# Altium PCB Frequenzweiche.PcbDoc
Units mm, origin at the board's own origin, x right, y up, seen from the top; angles counter-clockwise.
Board outline 150 x 75 mm, 2 copper layers (Top Layer, Bottom Layer); 153 components, 113 nets, 582 pads, 77 vias.
Unrouted connection lines stored in the file: 84.
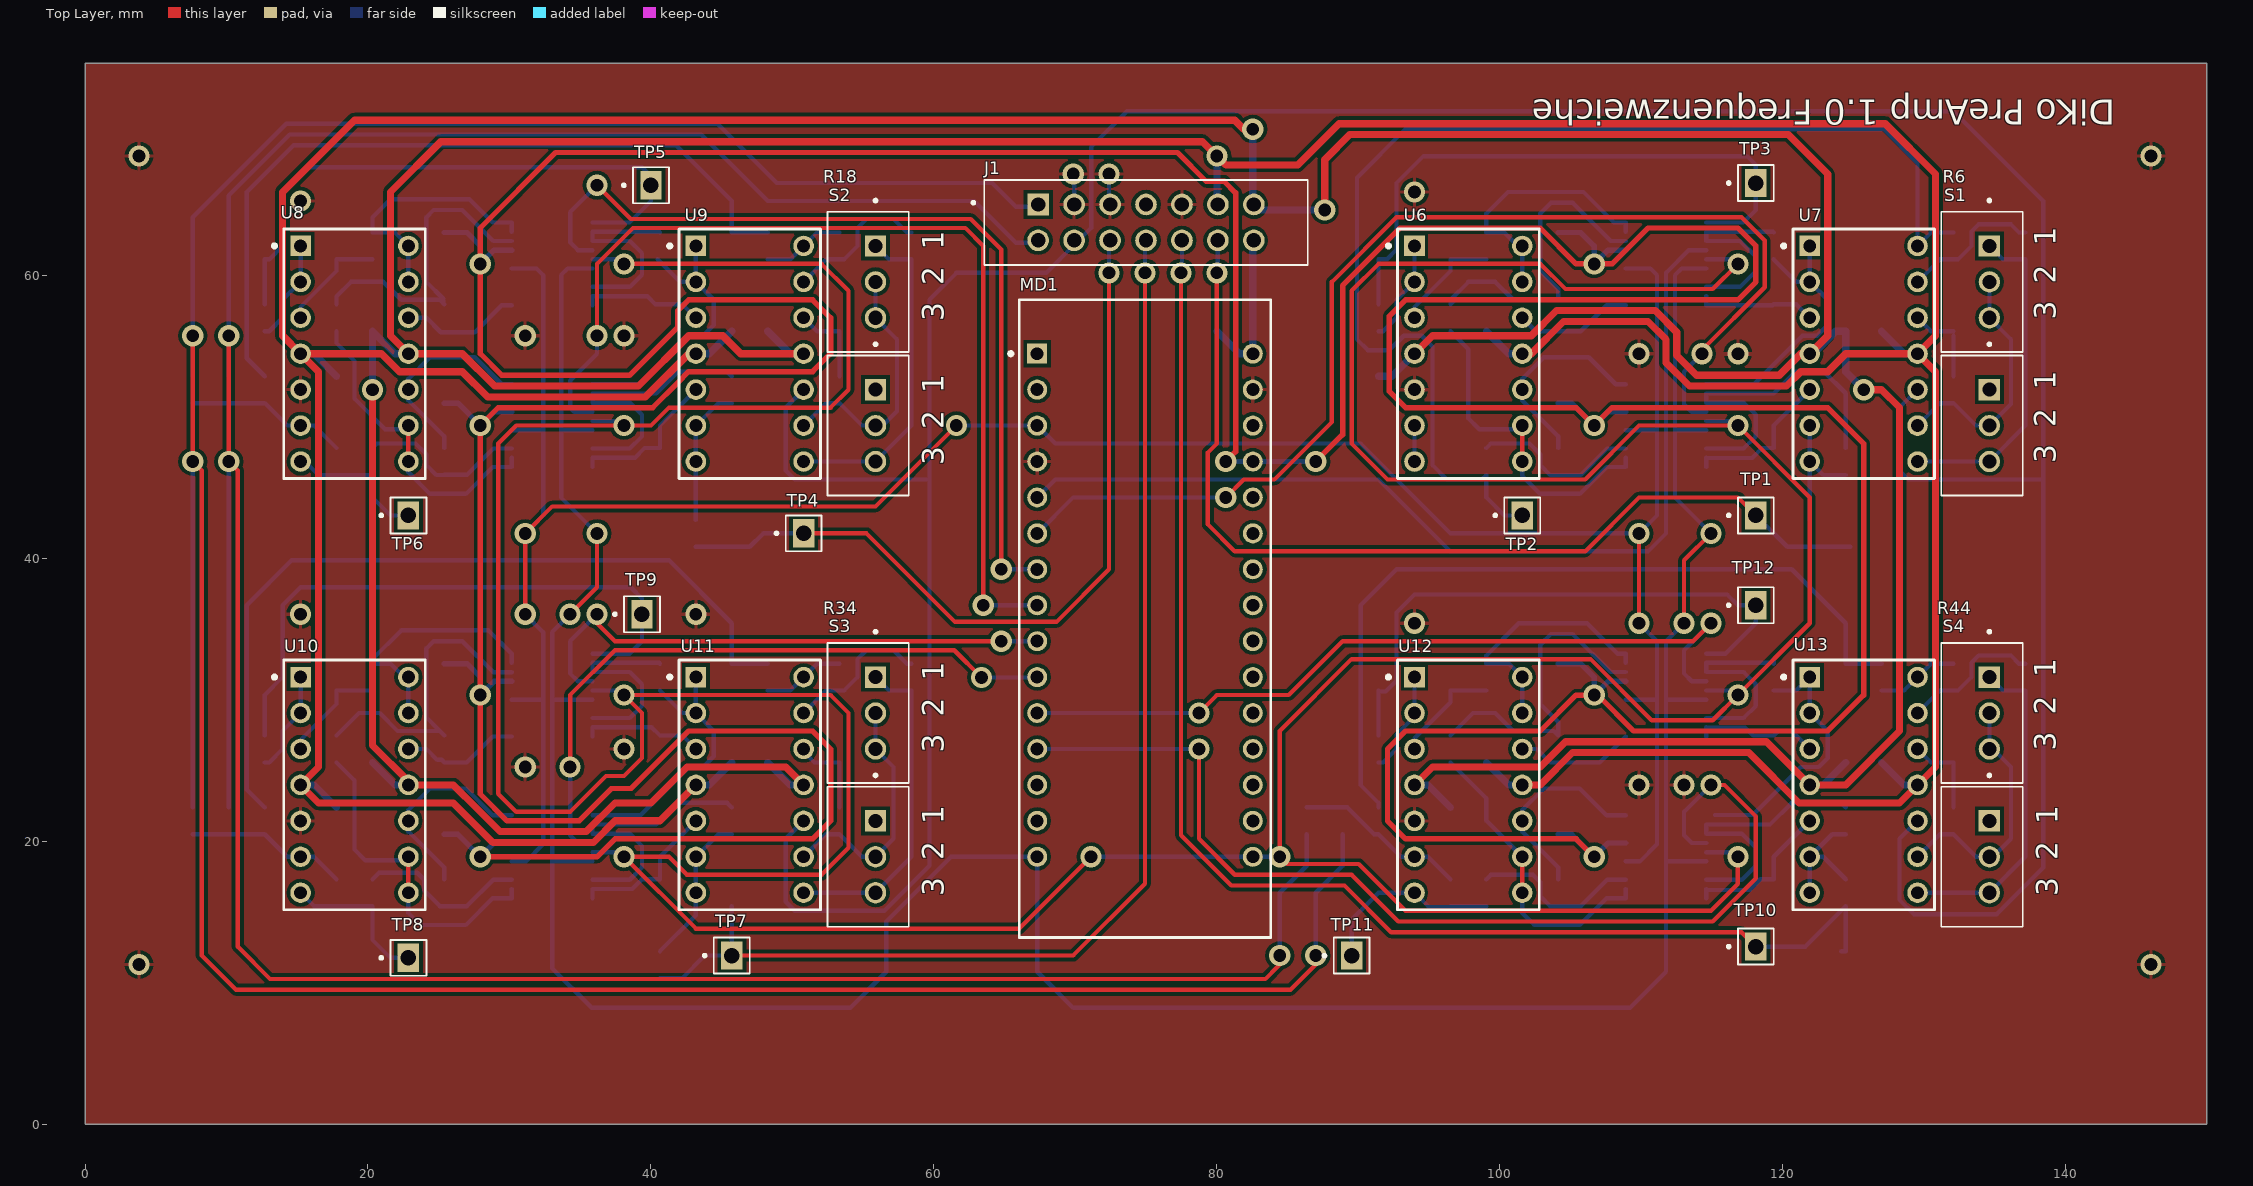
[diagram p0: Top Layer view]
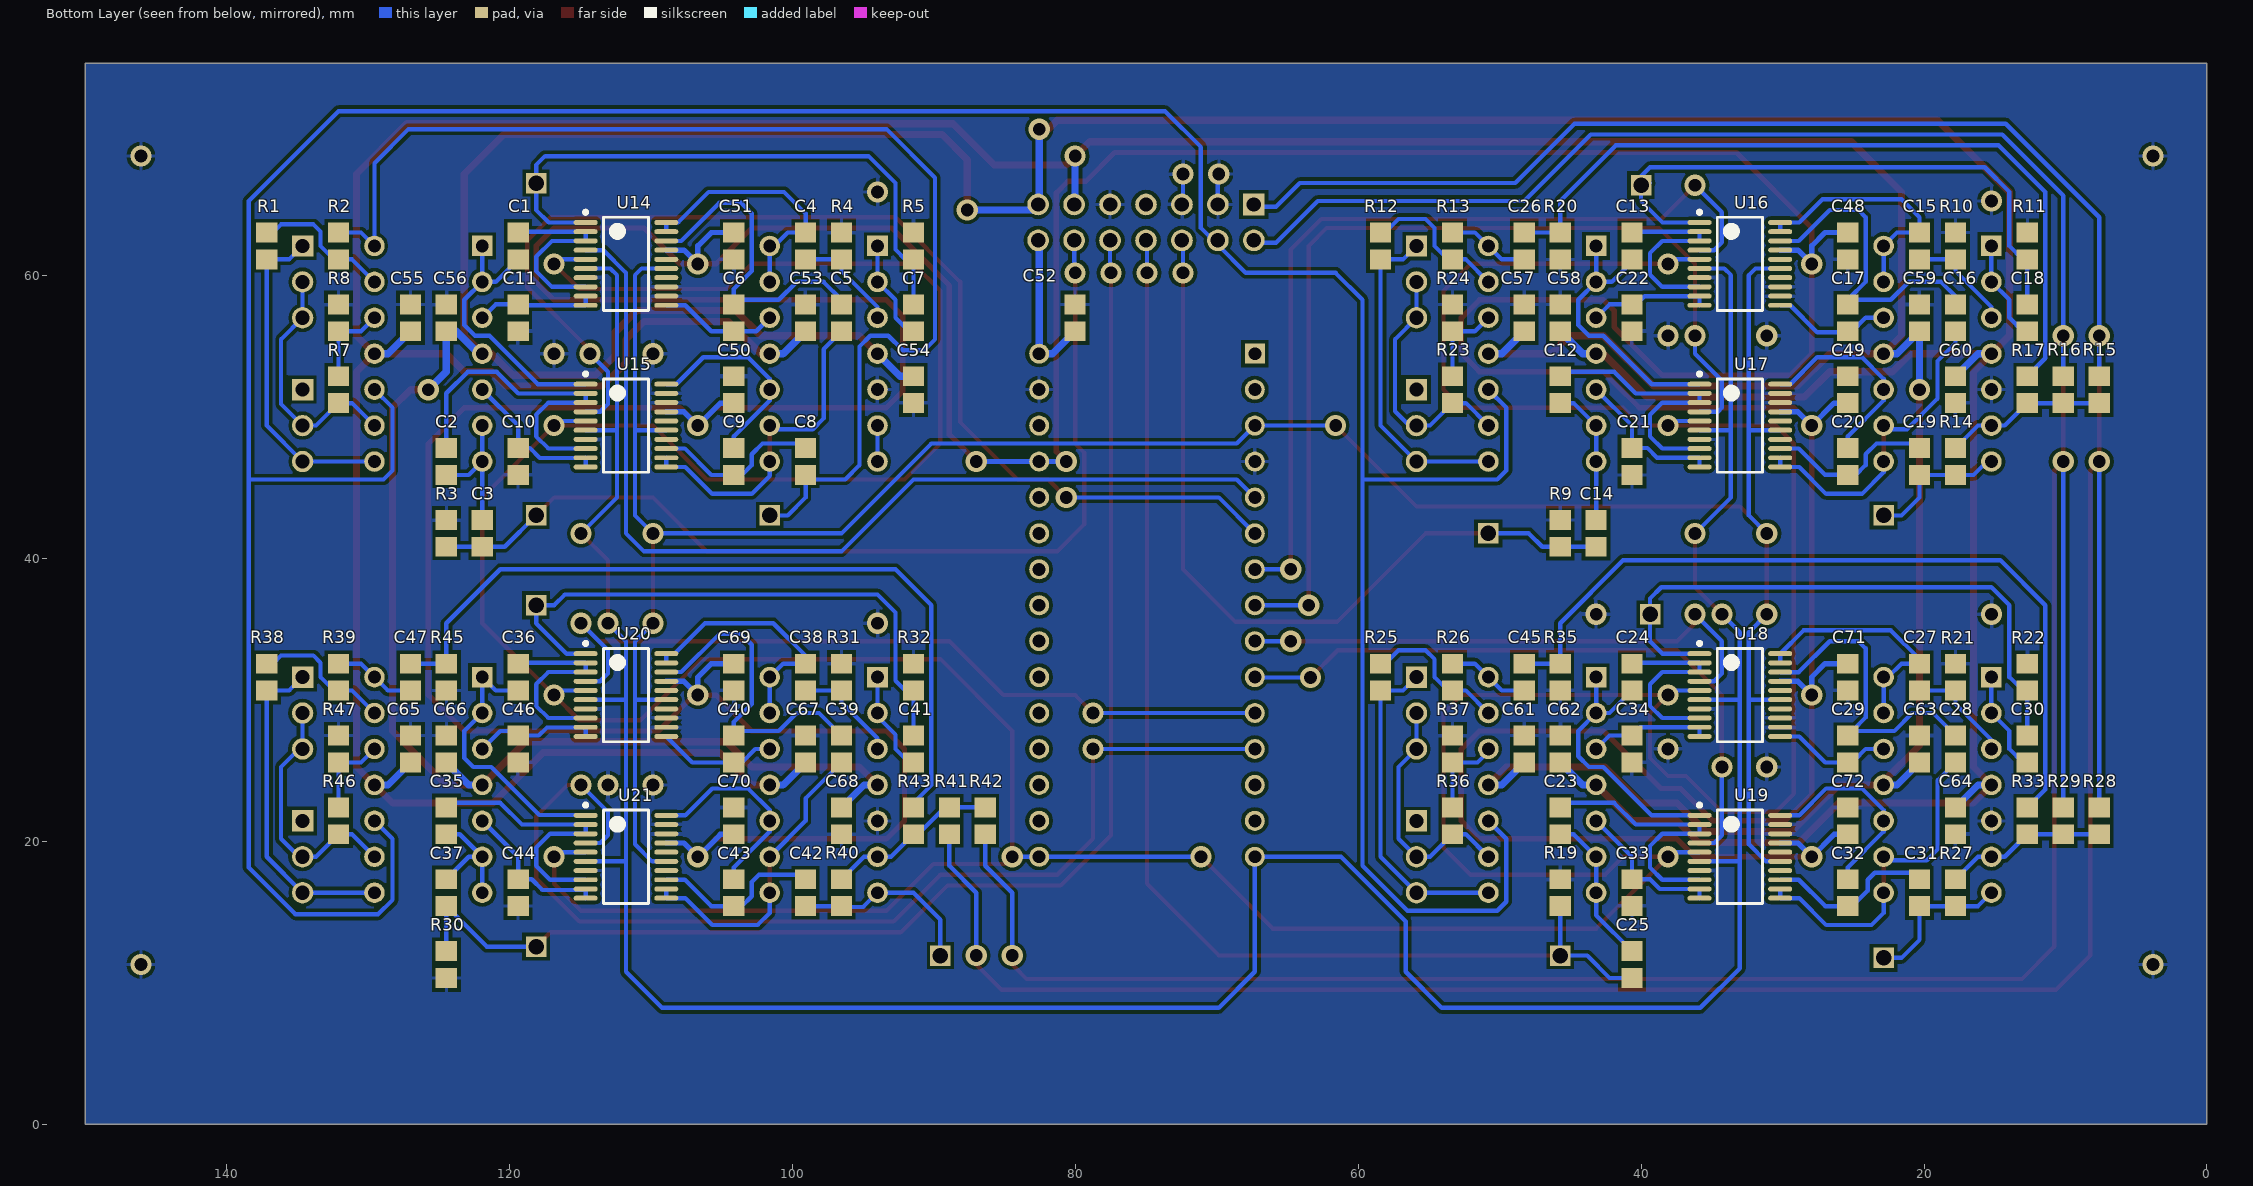
[diagram p1: Bottom Layer view, seen from below]
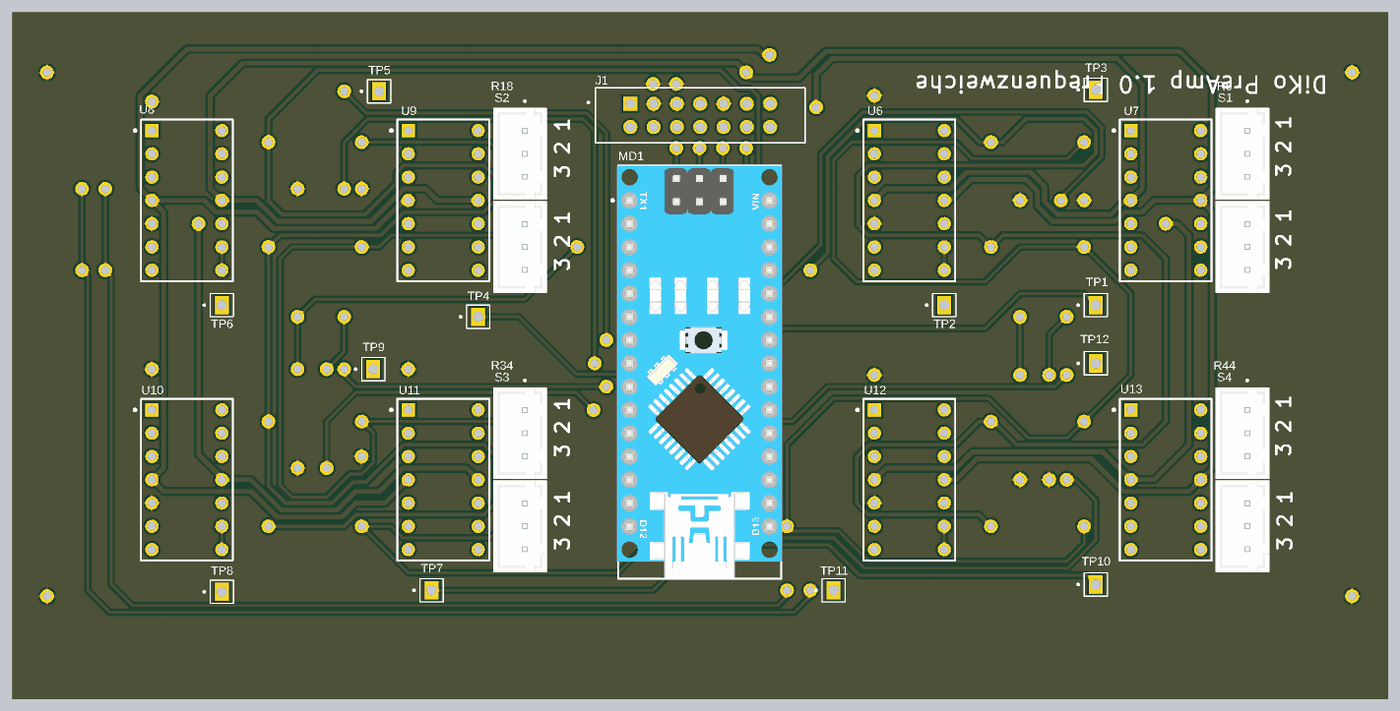
[diagram p2: 3D render of the assembled board from above, using the file's embedded part models]
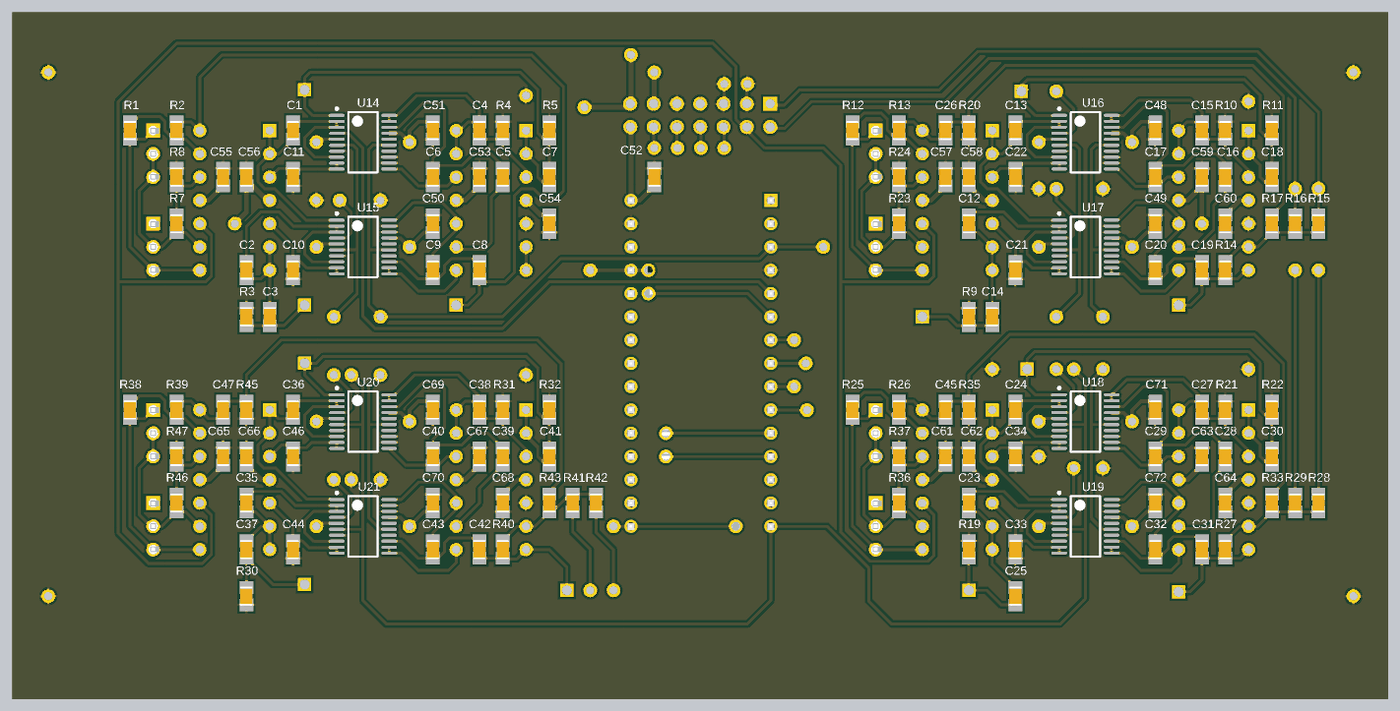
[diagram p3: 3D render of the assembled board from below, using the file's embedded part models]

## Layer stack, top to bottom
Top Solder: solder mask 0.0102, Solder Resist, Dk 3.5
Top Layer: signal copper 0.0356
Dielectric 1: dielectric 0.32, FR-4, Dk 4.8
Bottom Layer: signal copper 0.0356
Bottom Solder: solder mask 0.0102, Solder Resist, Dk 3.5

## Board outline
0,0 150,0 150,75 0,75

## Design rules (kind name [scope] priority, off if disabled: settings)
Clearance [All] p1: gap=0.254 ignorepadtopadclearanceinfootprint=FALSE except(0: Arc-Hole Track-Hole SMDPad-Hole THPad-Hole Via-Hole Fill-Hole Poly-Hole Region-Hole Text-Hole)
HoleSize [All] p1: absolutevalues=TRUE maxlimit=5.08 minlimit=0.152 maxpercent=80.000 minpercent=20.000
HoleToHoleClearance [All] p1: gap=0.203 allowstackedmicrovias=TRUE
MinimumSolderMaskSliver [All] p1: minsoldermaskwidth=0.102
PolygonConnect [All] p1: connectstyle=Relief reliefconductorwidth=0.254 reliefentries=4 polygonreliefangle="90 Angle" airgapwidth=0.254
RoutingVias [All] p1: holewidth=0.9 width=1.5 viastyle="Through Hole" minholewidth=0.711 minwidth=1.27 maxholewidth=0.914 maxwidth=1.524
SilkToSilkClearance [All] p1: silktosilkclearance=0.102
SilkToSolderMaskClearance [IsPad] p1: minsilkscreentomaskgap=0.152 clearancetoexposedcopper=TRUE
SolderMaskExpansion [All] p1: expansion=0.051 istentingtop=FALSE
Width +18V [InNet('+18V')] p1: maxlimit=0.508 minlimit=0.508 preferedwidth=0.508
Width -18V [InNet('-18V')] p2: maxlimit=0.508 minlimit=0.508 preferedwidth=0.508
Width +6V [InNet('+6V')] p3: maxlimit=0.508 minlimit=0.508 preferedwidth=0.508
Width +5V_DP [InNet('5V_DP')] p4: maxlimit=0.508 minlimit=0.381 preferedwidth=0.381
Width [All] p5: maxlimit=0.305 minlimit=0.254 preferedwidth=0.305
25 further rules are at their usual default settings.

## Components (designator, comment, footprint, x,y, rotation, side; value= is the part's Value field where it differs from the comment)
C1 "22n" 0805 119.38,62.07 r270 bottom
C2 "22n" 0805 124.46,46.83 r270 bottom
C3 "10u" 0805 121.92,41.75 r270 bottom
C4 "10u" 0805 99.06,62.07 r270 bottom
C5 "22n" 0805 96.52,56.99 r90 bottom
C6 "22n" 0805 104.14,56.99 r270 bottom
C7 "10u" 0805 91.44,56.99 r90 bottom
C8 "22n" 0805 99.06,46.83 r90 bottom
C9 "22n" 0805 104.14,46.83 r90 bottom
C10 "22n" 0805 119.38,46.83 r90 bottom
C11 "22n" 0805 119.38,56.99 r90 bottom
C12 "22n" 0805 45.72,51.91 r270 bottom
C13 "22n" 0805 40.64,62.07 r270 bottom
C14 "10u" 0805 43.18,41.75 r270 bottom
C15 "10u" 0805 20.32,62.07 r270 bottom
C16 "22n" 0805 17.78,56.99 r90 bottom
C17 "22n" 0805 25.4,56.99 r270 bottom
C18 "10u" 0805 12.7,56.99 r90 bottom
C19 "22n" 0805 20.32,46.83 r90 bottom
C20 "22n" 0805 25.4,46.83 r90 bottom
C21 "22n" 0805 40.64,46.83 r90 bottom
C22 "22n" 0805 40.64,56.99 r90 bottom
C23 "22n" 0805 45.72,21.43 r270 bottom
C24 "22n" 0805 40.64,31.59 r270 bottom
C25 "10u" 0805 40.64,11.27 r270 bottom
C26 "10u" 0805 48.26,62.07 r90 bottom
C27 "10u" 0805 20.32,31.59 r270 bottom
C28 "22n" 0805 17.78,26.51 r90 bottom
C29 "22n" 0805 25.4,26.51 r270 bottom
C30 "10u" 0805 12.7,26.51 r90 bottom
C31 "22n" 0805 20.32,16.35 r90 bottom
C32 "22n" 0805 25.4,16.35 r90 bottom
C33 "22n" 0805 40.64,16.35 r90 bottom
C34 "22n" 0805 40.64,26.51 r90 bottom
C35 "22n" 0805 124.46,21.43 r270 bottom
C36 "22n" 0805 119.38,31.59 r270 bottom
C37 "10u" 0805 124.46,16.35 r270 bottom
C38 "10u" 0805 99.06,31.59 r270 bottom
C39 "22n" 0805 96.52,26.51 r90 bottom
C40 "22n" 0805 104.14,26.51 r270 bottom
C41 "10u" 0805 91.44,26.51 r90 bottom
C42 "22n" 0805 99.06,16.35 r90 bottom
C43 "22n" 0805 104.14,16.35 r90 bottom
C44 "22n" 0805 119.38,16.35 r90 bottom
C45 "10u" 0805 48.26,31.59 r90 bottom
C46 "22n" 0805 119.38,26.51 r90 bottom
C47 "10u" 0805 127,31.59 r90 bottom
C48 "100n" 0805 25.4,62.07 r90 bottom
C49 "100n" 0805 25.4,51.91 r270 bottom
C50 "100n" 0805 104.14,51.91 r270 bottom
C51 "100n" 0805 104.14,62.07 r90 bottom
C52 "100n" 0805 80.01,56.99 r270 bottom
C53 "100n" 0805 99.06,56.99 r270 bottom
C54 "100n" 0805 91.44,51.91 r90 bottom
C55 "100n" 0805 127,56.99 r270 bottom
C56 "100n" 0805 124.46,56.99 r270 bottom
C57 "100n" 0805 48.26,56.99 r270 bottom
C58 "100n" 0805 45.72,56.99 r270 bottom
C59 "100n" 0805 20.32,56.99 r270 bottom
C60 "100n" 0805 17.78,51.91 r90 bottom
C61 "100n" 0805 48.26,26.51 r270 bottom
C62 "100n" 0805 45.72,26.51 r270 bottom
C63 "100n" 0805 20.32,26.51 r270 bottom
C64 "100n" 0805 17.78,21.43 r90 bottom
C65 "100n" 0805 127,26.51 r270 bottom
C66 "100n" 0805 124.46,26.51 r270 bottom
C67 "100n" 0805 99.06,26.51 r270 bottom
C68 "100n" 0805 96.52,21.43 r90 bottom
C69 "100n" 0805 104.14,31.59 r90 bottom
C70 "100n" 0805 104.14,21.43 r270 bottom
C71 "100n" 0805 25.4,31.59 r90 bottom
C72 "100n" 0805 25.4,21.43 r270 bottom
J1 "Connector x14" "Connector x14" 75,62.46 r180 top
MD1 "A000005" "Arduino Nano" 74.93,35.718 r0 top
R1 "4k7" 0805 137.16,62.07 r90 bottom
R2 "10k" 0805 132.08,62.07 r90 bottom
R3 "220k" 0805 124.46,41.75 r270 bottom
R4 "220k" 0805 96.52,62.07 r270 bottom
R5 "220k" 0805 91.44,62.07 r270 bottom
R6 "47k log" "Connector x3" 134.62,59.53 r90 top
R7 "2k2" 0805 132.08,51.91 r90 bottom
R8 "5k" 0805 132.08,56.99 r270 bottom
R9 "220k" 0805 45.72,41.75 r270 bottom
R10 "220k" 0805 17.78,62.07 r270 bottom
R11 "220k" 0805 12.7,62.07 r270 bottom
R12 "4k7" 0805 58.42,62.07 r90 bottom
R13 "10k" 0805 53.34,62.07 r90 bottom
R14 "10k" 0805 17.78,46.83 r270 bottom
R15 "10k" 0805 7.62,51.91 r270 bottom
R16 "10k" 0805 10.16,51.91 r270 bottom
R17 "10k" 0805 12.7,51.91 r270 bottom
R18 "47k log" "Connector x3" 55.88,59.53 r90 top
R19 "220k" 0805 45.72,16.35 r270 bottom
R20 "220k" 0805 45.72,62.07 r90 bottom
R21 "220k" 0805 17.78,31.59 r270 bottom
R22 "220k" 0805 12.7,31.59 r270 bottom
R23 "2k2" 0805 53.34,51.91 r90 bottom
R24 "5k" 0805 53.34,56.99 r270 bottom
R25 "4k7" 0805 58.42,31.59 r90 bottom
R26 "10k" 0805 53.34,31.59 r90 bottom
R27 "10k" 0805 17.78,16.35 r270 bottom
R28 "10k" 0805 7.62,21.43 r270 bottom
R29 "10k" 0805 10.16,21.43 r270 bottom
R30 "220k" 0805 124.46,11.27 r90 bottom
R31 "220k" 0805 96.52,31.59 r270 bottom
R32 "220k" 0805 91.44,31.59 r270 bottom
R33 "10k" 0805 12.7,21.43 r270 bottom
R34 "47k log" "Connector x3" 55.88,29.05 r90 top
R35 "220k" 0805 45.72,31.59 r90 bottom
R36 "2k2" 0805 53.34,21.43 r90 bottom
R37 "5k" 0805 53.34,26.51 r270 bottom
R38 "4k7" 0805 137.16,31.59 r90 bottom
R39 "10k" 0805 132.08,31.59 r90 bottom
R40 "10k" 0805 96.52,16.35 r270 bottom
R41 "10k" 0805 88.9,21.43 r90 bottom
R42 "10k" 0805 86.36,21.43 r90 bottom
R43 "10k" 0805 91.44,21.43 r270 bottom
R44 "47k log" "Connector x3" 134.62,29.05 r90 top
R45 "220k" 0805 124.46,31.59 r90 bottom
R46 "2k2" 0805 132.08,21.43 r90 bottom
R47 "5k" 0805 132.08,26.51 r270 bottom
S1 "Schalter Buchsenleiste" "Connector x3" 134.62,49.37 r90 top
S2 "Schalter Buchsenleiste" "Connector x3" 55.88,49.37 r90 top
S3 "Schalter Buchsenleiste" "Connector x3" 55.88,18.89 r90 top
S4 "Schalter Buchsenleiste" "Connector x3" 134.62,18.89 r90 top
TP1 "Test_Pin" Test_Pin 119.38,43.02 r0 top
TP2 "Test_Pin" Test_Pin 102.87,43.02 r0 top
TP3 "Test_Pin" Test_Pin 119.38,66.515 r0 top
TP4 "Test_Pin" Test_Pin 52.07,41.75 r0 top
TP5 "Test_Pin" Test_Pin 41.275,66.355 r0 top
TP6 "Test_Pin" Test_Pin 24.13,43.02 r0 top
TP7 "Test_Pin" Test_Pin 46.99,11.905 r0 top
TP8 "Test_Pin" Test_Pin 24.13,11.745 r0 top
TP9 "Test_Pin" Test_Pin 40.64,36.035 r0 top
TP10 "Test_Pin" Test_Pin 119.38,12.54 r0 top
TP11 "Test_Pin" Test_Pin 90.805,11.905 r0 top
TP12 "Test_Pin" Test_Pin 119.38,36.67 r0 top
U6 "OPA4134UA" "DIP14 IC Socket" 97.79,54.45 r90 top
U7 "OPA4134UA" "DIP14 IC Socket" 125.73,54.45 r90 top
U8 "OPA4134UA" "DIP14 IC Socket" 19.05,54.45 r90 top
U9 "OPA4134UA" "DIP14 IC Socket" 46.99,54.45 r90 top
U10 "OPA4134UA" "DIP14 IC Socket" 19.05,23.97 r90 top
U11 "OPA4134UA" "DIP14 IC Socket" 46.99,23.97 r90 top
U12 "OPA4134UA" "DIP14 IC Socket" 97.79,23.97 r90 top
U13 "OPA4134UA" "DIP14 IC Socket" 125.73,23.97 r90 top
U14 "MCP4361-103E/ST" "MCP 4361" 111.76,60.8 r180 bottom
U15 "MCP4361-103E/ST" "MCP 4361" 111.76,49.37 r180 bottom
U16 "MCP4361-103E/ST" "MCP 4361" 33.02,60.8 r180 bottom
U17 "MCP4361-103E/ST" "MCP 4361" 33.02,49.37 r180 bottom
U18 "MCP4361-103E/ST" "MCP 4361" 33.02,30.32 r180 bottom
U19 "MCP4361-103E/ST" "MCP 4361" 33.02,18.89 r180 bottom
U20 "MCP4361-103E/ST" "MCP 4361" 111.76,30.32 r180 bottom
U21 "MCP4361-103E/ST" "MCP 4361" 111.76,18.89 r180 bottom

## Footprints (in the part's own frame and the unit in brackets; to place one, negate y for a bottom-side part, rotate by r counter-clockwise, add the part's x,y. Pads: shape width x height; smd on the part's side, far side on the other; paste and mask are expansions set on the pad)
0805 [mm] "0805"
  rect 1.4x1.5 smd: 1(-0.95,0) 2(0.95,0)
  body extent -1.05,-0.67 1.05,0.67, height 1.35
"Arduino Nano" [mil]
  rect 55.67x55.67 hole 35.98 paste-39370.1 mask+0: 1(-300,737.5)
  round 55.67 hole 35.98 paste-39370.1 mask+0: 2(-300,637.5) 3(-300,537.5) 4(-300,437.5) 5(-300,337.5) 6(-300,237.5) 7(-300,137.5) 8(-300,37.5) 9(-300,-62.5) 10(-300,-162.5) 11(-300,-262.5) 12(-300,-362.5) 13(-300,-462.5) 14(-300,-562.5) 15(-300,-662.5) 16(300,-662.5) 17(300,-562.5) 18(300,-462.5) 19(300,-362.5) 20(300,-262.5) 21(300,-162.5) 22(300,-62.5) 23(300,37.5) 24(300,137.5) 25(300,237.5) 26(300,337.5) 27(300,437.5) 28(300,537.5) 29(300,637.5) 30(300,737.5)
  silkscreen extent -379,-888 350,888, body extent -354,-891 354,891, height 10
"Connector x3" [mm] "Connector x3"
  rect 1.508x1.508 / inner round 1.508 / far side rect 1.508x1.508 hole 1: 1(2.54,0)
  round 1.508 hole 1: 2(0,0) 3(-2.54,0)
  silkscreen extent -4.95,-2.35 5.85,3.4, body extent -4.95,-2.35 4.95,3.4, height 7
"Connector x14" [mm]
  rect 1.53x1.53 hole 1.02: 1(7.62,-2.54)
  round 1.53 hole 1.02: 2(7.62,0) 3(5.08,-2.54) 4(5.08,0) 5(2.54,-2.54) 6(2.54,0) 7(0,-2.54) 8(0,0) 9(-2.54,-2.54) 10(-2.54,0) 11(-5.08,-2.54) 12(-5.08,0) 13(-7.62,-2.54) 14(-7.62,0)
  silkscreen extent -11.43,-4.27 12.3,1.73
"DIP14 IC Socket" [mm] "Socket, 14-Leads, Body 17.653x10.0076mm, Pitch 2.54mm"
  rect 1.45x1.45 hole 0.911: 1(7.62,3.81)
  round 1.45 hole 0.911: 2(5.08,3.81) 3(2.54,3.81) 4(0,3.81) 5(-2.54,3.81) 6(-5.08,3.81) 7(-7.62,3.81) 8(-7.62,-3.81) 9(-5.08,-3.81) 10(-2.54,-3.81) 11(0,-3.81) 12(2.54,-3.81) 13(5.08,-3.81) 14(7.62,-3.81)
  silkscreen extent -8.83,-5 8.83,5.78, body extent -8.83,-5 8.83,5, height 5.36
"MCP 4361" [mm] "TSOP, 20-Leads, Body 6.5x4.4mm, Pitch 0.65mm, IPC Medium Density"
  oval 1.7x0.35 smd: 1(-2.85,2.925) 2(-2.85,2.275) 3(-2.85,1.625) 4(-2.85,0.975) 5(-2.85,0.325) 6(-2.85,-0.325) 7(-2.85,-0.975) 8(-2.85,-1.625) 9(-2.85,-2.275) 10(-2.85,-2.925) 11(2.85,-2.925) 12(2.85,-2.275) 13(2.85,-1.625) 14(2.85,-0.975) 15(2.85,-0.325) 16(2.85,0.325) 17(2.85,0.975) 18(2.85,1.625) 19(2.85,2.275) 20(2.85,2.925)
  silkscreen extent -2.98,-3.3 1.6,3.77, body extent -2.25,-3.3 2.25,3.3, height 1.2
Test_Pin [mm]
  rect 1.508x2 / inner round 1.45 / far side rect 1.45x1.45 hole 1.1: 01(-1.27,0)
  silkscreen extent -3.29,-1.27 0,1.27

## Part data
C1 C2 C3 C4 C5 C6 C7 C8 C9 C10 C11 C12 C13 C14 C15 C16 C17 C18 C19 C20 C21 C22 C23 C24 C25 C26 C27 C28 C29 C30 C31 C32 C33 C34 C35 C36 C37 C38 C39 C40 C41 C42 C43 C44 C45 C46 C47 C48 C49 C50 C51 C52 C53 C54 C55 C56 C57 C58 C59 C60 C61 C62 C63 C64 C65 C66 C67 C68 C69 C70 C71 C72: library part "0805 Kondensator", "0805 Kondensator"
J1: "14 Position Header Connector Through Hole", Package=None, Availability=Warning, Check_prices=https://www.snapeda.com/parts/SFH11-PBPC-D07-ST-BK/Sullins%20Connector%20Solutions/view-part/851415/?ref=eda, MF="Sullins Connector", MP=SFH11-PBPC-D07-ST-BK, Price=None, Purchase-URL=https://pricing.snapeda.com/search/part/SFH11-PBPC-D07-ST-BK/?ref=eda, SnapEDA_Link=https://www.snapeda.com/parts/SFH11-PBPC-D07-ST-BK/Sullins%20Connector%20Solutions/view-part/851415/?ref=snap, System=Connector
MD1: library part "Arduino Nano", "ARDUINO NANO ATMEGA328 EVAL BRD", Operating Supply Voltage=12V, Package Quantity=50, Core Architecture=AVR, Data Bus Width=8b, Evaluation Kit=Yes, Height=0.25inch, Interface=I2C, Length=7inch, Number of Bits=8, Packaging=Bulk, REACH SVHC="No SVHC", Series="AVR® ATmega", Weight=0.358383oz, Width=5inch
R1 R2 R3 R4 R5 R7 R8 R9 R10 R11 R12 R13 R14 R15 R16 R17 R19 R20 R21 R22 R23 R24 R25 R26 R27 R28 R29 R30 R31 R32 R33 R35 R36 R37 R38 R39 R40 R41 R42 R43 R45 R46 R47: library part "0805 Widerstand", "0805 Widerstand"
R6 R18 R34 R44: library part "Potentiometer Buchsenleiste", "Potentiometer"
S1 S2 S3 S4: "Toggle Switch SPDT Through Hole", Package=None, Availability=Unavailable, MP=100SP1T1B4M2QE, Price=None
TP1 TP2 TP3 TP4 TP5 TP6 TP7 TP8 TP9 TP10 TP11 TP12: "Connector Header Through Hole 2 position 0.100 (2.54mm)", Package=None, Check_prices=https://www.snapeda.com/parts/61300211121/Wurth+Elektronik/view-part/?ref=eda, MF="Wurth Elektronik", MP=61300211121, SnapEDA_Link=https://www.snapeda.com/parts/61300211121/Wurth+Elektronik/view-part/?ref=snap
U6 U7 U8 U9 U10 U11 U12 U13: library part "SOIC OPA4134UA", "SoundPlus(TM) High Performance Audio Operational Amplifier, 5 to 36 V, -55 to 125 degC, 14-pin SOIC (D14), Green (RoHS & no Sb/Br)", Manufacturer="Texas Instruments", Code_JEDEC=MS-012, ComponentLink1Description="Manufacturer URL", ComponentLink1URL=http://www.ti.com/, ComponentLink2Description=Datasheet, ComponentLink2URL=http://www.ti.com/general/docs/lit/getliterature.tsp?genericPartNumber=OPA4134&fileType=pdf, ComponentLink3Description="Package Specification", ComponentLink3URL=http://www.ti.com/lit/ml/mpds177g/mpds177g.pdf, DatasheetVersion=SBOS058, Eco-Plan="Green (RoHS & no Sb/Br)", GBW(Typ)(MHz)=8, Iq per channel(Max)(mA)=5, Mounting Technology="Surface Mount", Number of Channels=4, PackageDescription="14-Pin Plastic Small Outline, Body 8.65 x 3.9 mm, Pitch 1.27 mm", PackageReference=D0014A, PackageVersion="4040047-5/M, 06/2011", PartNumber=OPA4134UA, SubFamily="Audio Operational Amplifier", Vmax(V)=36, Vmin(V)=5, Vn at Flatband(Typ)(nV/rtHz)=8
U14 U15 U16 U17 U18 U19 U20 U21: library part "MCP 4361", "7/8-Bit Quad SPI Digital POT with Non-Volatile Memory, 20-Pin TSSOP, Extended Temperature", Code_JEDEC=MO-153-AC, ComponentLink1Description="Manufacturer URL", ComponentLink1URL=http://www.microchip.com/, ComponentLink2Description=Datasheet, ComponentLink2URL=http://ww1.microchip.com/downloads/en/DeviceDoc/22233a.pdf, ComponentLink3Description="Package Specification", ComponentLink3URL=http://www.microchip.com/stellent/groups/techpub_sg/documents/packagingspec/en012702.pdf, DatasheetVersion="revA, Dec-2009", PackageDescription="20-Lead Plastic Thin Shrink Small Outline (ST) - 4.4mm Body [TSSOP]", PackageReference=TSSOP-ST20, PackageVersion="revBB, Aug-2009"

## Via types
v1: diameter 1.5, hole 0.9, Top Layer to Bottom Layer, 77 vias

## Nets (pads, with @x,y where several pads share a name; then routed paths per layer and width w, separated by ;. In a path a pad name is that pad's centre, name@x,y a point inside that pad or via, vN(x,y) a via of type N, cw(c..) or ccw(c..) an arc to the next point about the centre after c; other vN are vias at no path point)
5V_DP: C48.2 C49.2 C50.2 C51.2 C69.2 C70.2 C71.2 C72.2 MD1.27 U14.17 U15.17 U16.17 U17.17 U18.17 U19.17 U20.17 U21.17 | length 479.3
  Top Layer w0.381: v1(27.94,18.89) 36.195,18.89 37.465,20.16 51.435,20.16 52.705,21.43 52.705,26.51 51.435,27.78 42.672,27.78 38.608,23.716 37.211,23.716 34.925,21.43 29.845,21.43 27.94,23.335 v1(27.94,30.32) v1(27.94,49.37) 29.21,50.64 40.132,50.64 41.91,52.418 42.672,53.18 51.435,53.18 52.705,54.45 52.705,56.99 51.435,58.26 42.672,58.26 41.91,57.498 41.91,56.355 38.481,52.926 29.464,52.926 27.94,54.45 v1(27.94,60.8) 27.94,63.34 33.274,68.674 77.216,68.674 79.248,66.642 80.518,66.642 81.339,65.821 81.339,47.524 v1(80.645,46.83) ; v1(86.995,46.83) 88.9,48.735 88.9,59.276 92.964,63.34 102.87,63.34 105.41,60.8 v1(106.68,60.8) 107.95,60.8 110.49,63.34 116.84,63.34 118.11,62.07 118.11,59.53 116.84,58.26 93.345,58.26 92.202,57.117 92.202,51.783 93.345,50.64 105.41,50.64 v1(106.68,49.37) 107.95,50.64 123.19,50.64 125.73,48.1 125.73,30.32 123.19,27.78 109.474,27.78 106.934,30.32 v1(106.68,30.32) 105.41,30.32 102.87,27.78 93.345,27.78 92.075,26.51 92.075,21.43 93.345,20.16 105.41,20.16 v1(106.68,18.89)
  Bottom Layer w0.381: C72.2 26.35,20.48 v1(27.94,18.89) 28.915,19.865 U19.17 ; C71.2 26.99,32.54 27.94,31.59 v1(27.94,30.32) 28.915,31.295 U18.17 ; C49.2 26.35,50.96 v1(27.94,49.37) 28.915,50.345 U17.17 ; C48.2 26.99,63.02 27.94,62.07 v1(27.94,60.8) 28.915,61.775 U16.17 ; v1(80.645,46.83) MD1.27 v1(86.995,46.83) ; C70.2 105.09,20.48 v1(106.68,18.89) 107.655,19.865 U21.17 ; C69.2 105.73,32.54 106.68,31.59 v1(106.68,30.32) 107.655,31.295 U20.17 ; C50.2 105.09,50.96 v1(106.68,49.37) 107.655,50.345 U15.17 ; C51.2 105.73,63.02 106.68,62.07 v1(106.68,60.8) 107.655,61.775 U14.17
+6V: C52.2 J1.14 MD1.30 | length 11.1
  Bottom Layer w0.508: C52.2 81.6,54.45 MD1.30 82.55,62.23 J1.14@82.62,62.3
+18V: C54.2 C56.2 C58.2 C60.2 C62.2 C64.2 C66.2 C68.2 J1.13 U6.4 U7.4 U8.4 U9.4 U10.4 U11.4 U12.4 U13.4 | length 368.3
  Top Layer w0.508: U11.4 40.64,21.43 37.465,21.43 35.941,19.906 28.829,19.906 26.035,22.7 16.51,22.7 U10.4 16.51,25.24 16.51,53.18 15.875,53.815 U8.4 ; U9.4 42.672,54.45 39.624,51.402 28.448,51.402 26.67,53.18 22.225,53.18 20.955,54.45 U8.4 ; v1(82.55,70.325) 81.915,70.325 81.28,70.96 19.05,70.96 13.97,65.88 13.97,55.72 U8.4 ; v1(87.63,64.61) 87.63,68.166 89.408,69.944 120.396,69.944 123.19,67.15 123.19,55.72 U7.4 121.285,54.45 119.761,52.926 113.919,52.926 112.522,54.323 112.522,55.974 110.998,57.498 104.013,57.498 102.235,55.72 95.25,55.72 U6.4 ; U12.4 95.25,25.24 102.87,25.24 104.648,27.018 118.872,27.018 U13.4 124.46,23.97 128.27,27.78 128.27,50.64 127,51.91 v1(125.73,51.91)
  Bottom Layer w0.508: U10.4 16.19,23.97 C64.2 ; U8.4 16.19,54.45 C60.2 ; U11.4 44.13,23.97 C62.2 ; U9.4 44.13,54.45 C58.2 ; J1.13@82.55,64.91 v1(82.55,70.325) ; J1.13 83.01,64.61 v1(87.63,64.61) ; C54.2 92.39,52.86 U6.4 ; U12.4 94.93,23.97 C68.2 ; U13.4 122.87,23.97 C66.2 ; U7.4 122.174,54.45 123.764,56.04 C56.2 124.46,53.18 v1(125.73,51.91)
-18V: C53.2 C55.2 C57.2 C59.2 C61.2 C63.2 C65.2 C67.2 J1.11 U6.11 U7.11 U8.11 U9.11 U10.11 U11.11 U12.11 U13.11 | length 359.3
  Top Layer w0.508: v1(20.32,51.91) 20.32,26.764 22.86,24.224 U10.11 26.035,23.97 27.813,22.192 29.337,20.668 35.433,20.668 37.465,22.7 40.005,22.7 42.545,25.24 49.53,25.24 U11.11 ; U9.11 46.355,54.45 45.085,55.72 42.672,55.72 39.116,52.164 28.956,52.164 26.67,54.45 U8.11 21.59,55.72 21.59,65.88 25.146,69.436 78.994,69.436 v1(80.01,68.42) 80.645,67.785 85.725,67.785 88.646,70.706 127.254,70.706 130.81,67.15 130.81,55.72 U7.11 ; U12.11 102.87,23.97 105.156,26.256 117.602,26.256 121.158,22.7 128.27,22.7 U13.11 130.81,25.24 130.81,53.18 U7.11 ; U6.11 102.235,54.45 104.521,56.736 110.49,56.736 111.76,55.466 111.76,53.815 113.411,52.164 120.269,52.164 121.285,53.18 123.19,53.18 124.46,54.45 U7.11
  Bottom Layer w0.508: C63.2 21.91,23.97 U10.11 ; v1(20.32,51.91) C59.2 21.91,54.45 U8.11 ; C61.2 49.85,23.97 U11.11 ; C57.2 49.85,54.45 U9.11 ; v1(80.01,68.42) 80.01,64.91 J1.11@80.08,64.84 ; C67.2 100.65,23.97 U12.11 ; C53.2 100.65,54.45 U6.11 ; C65.2 128.59,23.97 U13.11 ; C55.2 128.59,54.45 U7.11
ASEQ_Bass: C3.2 J1.12 R3.2 TP1.01 | length 69.4
  Top Layer w0.305: v1(80.01,60.165) 80.01,48.1 79.375,47.465 79.375,42.385 81.28,40.48 106.045,40.48 109.855,44.29 116.84,44.29 TP1.01
  Bottom Layer w0.305: v1(80.01,60.165) 80.08,60.235 J1.12@80.08,62.3 ; TP1.01 120.33,40.8 C3.2 R3.2 R3.2@124.78,40.8
ASEQ_Höhen: C37.2 J1.10 R30.2 TP10.01 | length 97.3
  Top Layer w0.305: v1(77.47,60.165) 77.47,21.43 77.47,20.414 81.026,16.858 89.027,16.858 92.329,13.556 117.094,13.556 TP10.01
  Bottom Layer w0.305: v1(77.47,60.165) 77.54,60.235 J1.10@77.54,62.3 ; TP10.01@117.71,12.54 TP10.01 121.6,12.54 C37.2 R30.2 R30.2@124.14,12.22
ASEQ_Kick: C14.2 J1.6 R9.2 TP4.01 | length 57.4
  Top Layer w0.305: TP4.01 55.245,41.75 61.501,35.494 68.674,35.494 72.39,39.21 v1(72.39,60.165) ; TP4.01@50.96,41.59 TP4.01@51.341,41.209
  Bottom Layer w0.305: C14.2 R9.2 46.99,40.8 47.94,41.75 TP4.01 ; v1(72.39,60.165) 72.39,62.23 J1.6@72.46,62.3
ASEQ_Mitten: C25.2 J1.8 R19.2 TP7.01 | length 85.9
  Top Layer w0.305: TP7.01 69.85,11.905 74.93,16.985 v1(74.93,60.165)
  Bottom Layer w0.305: C25.2 42.23,10.32 43.815,11.905 TP7.01 R19.2 ; v1(74.93,60.165) 74.93,62.23 J1.8@75,62.3
Aux_Sum: J1.2 R16.1 R29.1 R42.1 | length 227.9
  Top Layer w0.305: v1(10.16,55.72) v1(10.16,46.83) 10.795,46.195 10.795,12.54 13.081,10.254 83.439,10.254 84.295,11.11 84.455,11.27 v1(84.455,11.905)
  Bottom Layer w0.305: R29.1 v1(10.16,46.83) ; R16.1 v1(10.16,55.72) 10.16,65.626 14.478,69.944 43.561,69.944 48.26,65.245 62.865,65.245 65.81,62.3 J1.2@67.38,62.3 ; v1(84.455,11.905) 84.455,16.35 86.36,18.255 R42.1
Bass_In: C8.1 R2.2 TP2.01 U7.14 | length 86
  Bottom Layer w0.305: TP2.01 100.33,43.02 99.06,44.29 C8.1 98.74,45.56 96.266,45.56 95.25,46.576 95.25,54.958 94.488,55.72 93.218,55.72 92.202,54.704 90.678,54.704 89.916,55.466 89.916,66.896 93.345,70.325 127.127,70.325 129.54,67.912 U7.14 130.49,63.02 R2.2
Clock: MD1.16 U14.5 U15.5 U16.5 U17.5 U18.5 U19.5 U20.5 U21.5 | length 380.7
  Top Layer w0.305: v1(38.1,60.8) 52.07,60.8 53.975,58.895 53.975,51.91 52.705,50.64 41.275,50.64 40.005,49.37 v1(38.1,49.37) 30.48,49.37 29.21,48.1 29.21,23.335 30.48,22.065 34.29,22.065 36.83,24.605 38.1,24.605 39.37,25.875 39.37,29.05 v1(38.1,30.32) 52.705,30.32 53.975,29.05 53.975,19.525 52.07,17.62 42.545,17.62 41.275,18.89 v1(38.1,18.89) 43.18,13.81 66.04,13.81 v1(71.12,18.89) ; v1(116.84,18.89) 116.84,16.985 114.935,15.08 93.345,15.08 90.043,18.382 84.963,18.382 v1(84.455,18.89) 84.455,27.78 89.535,32.86 106.426,32.86 110.744,28.542 115.062,28.542 v1(116.84,30.32) 121.92,35.4 121.92,44.29 v1(116.84,49.37) 109.855,49.37 106.045,45.56 92.075,45.56 89.535,48.1 89.535,58.895 91.44,60.8 102.87,60.8 104.648,59.022 115.062,59.022 v1(116.84,60.8)
  Bottom Layer w0.305: U19.5 37.775,19.215 v1(38.1,18.89) ; U18.5 37.775,30.645 v1(38.1,30.32) ; U17.5 37.775,49.695 v1(38.1,49.37) ; U16.5 37.775,61.125 v1(38.1,60.8) ; v1(71.12,18.89) MD1.16 v1(84.455,18.89) ; U21.5 116.515,19.215 v1(116.84,18.89) ; U20.5 116.515,30.645 v1(116.84,30.32) ; U15.5 116.515,49.695 v1(116.84,49.37) ; U14.5 116.515,61.125 v1(116.84,60.8)
Data: MD1.15 U14.6 U15.6 U16.6 U17.6 U18.6 U19.6 U20.6 U21.6 | length 220.4
  Top Layer w0.305: v1(34.29,36.035) 36.195,37.94 v1(36.195,41.75) ; v1(113.03,35.4) 113.03,39.845 v1(114.935,41.75)
  Bottom Layer w0.305: v1(34.29,36.035) 33.02,34.765 33.02,30.066 ; U19.6 33.091,18.565 33.02,18.636 ; U18.6 33.091,29.995 33.02,30.066 ; U17.6 33.692,49.045 33.655,49.008 ; U16.6 34.125,60.475 33.655,60.005 33.655,49.008 ; v1(36.195,41.75) 33.655,44.29 33.655,49.008 ; v1(113.03,35.4) 111.76,34.13 111.76,30.066 ; U21.6 111.831,18.565 111.76,18.636 ; U20.6 111.831,29.995 111.76,30.066 ; U15.6 112.466,49.045 112.395,49.116 ; U14.6 112.865,60.475 112.395,60.005 112.395,49.116 ; v1(114.935,41.75) 112.395,44.29 112.395,49.116 ; 33.02,18.636 33.02,11.016 35.814,8.222 54.102,8.222 56.642,10.762 56.642,14.318 61.214,18.89 MD1.15 67.31,10.762 69.85,8.222 109.22,8.222 111.76,10.762 111.76,18.636 ; 33.02,18.636 33.02,30.066 ; 111.76,18.636 111.76,30.066
DP_1: MD1.5 U14.4 | length 69.5
  Bottom Layer w0.305: MD1.5 68.58,45.56 91.44,45.56 96.52,40.48 108.712,40.48 110.49,40.48 111.76,41.75 111.76,60.165 113.37,61.775 U14.4
DP_1B: C8.2 C9.1 U15.13 | length 12.1
  Bottom Layer w0.305: C8.2 99.38,48.1 102.108,48.1 102.87,47.338 102.87,46.576 103.566,45.88 C9.1 105.73,45.88 107.595,47.745 U15.13
DP_1W: C5.1 U6.8 U6.9 U15.11 U15.12 | length 23.7
  Top Layer w0.305: U6.8 U6.9
  Bottom Layer w0.305: C5.1 97.79,54.77 97.79,49.878 98.552,49.116 101.346,49.116 U6.9 ; U6.8 101.6,45.814 102.87,44.544 105.664,44.544 107.565,46.445 U15.11 U15.12
DP_2: MD1.6 U15.4 | length 82.9
  Top Layer w0.305: v1(80.645,44.29) 81.915,45.56 84.074,45.56 88.138,49.624 88.138,59.53 92.71,64.102 117.094,64.102 118.745,62.451 118.745,59.149 114.3,54.704 v1(114.3,54.45)
  Bottom Layer w0.305: MD1.6 69.85,44.29 v1(80.645,44.29) ; v1(114.3,54.45) 113.03,53.18 113.03,50.894 113.579,50.345 U15.4
DP_2A: C9.2 U6.10 U15.20 | length 14.7
  Bottom Layer w0.305: C9.2 104.14,48.608 101.6,51.148 U6.10 101.6,52.672 103.124,54.196 106.299,54.196 108.2,52.295 U15.20
DP_3: MD1.7 U16.4 | length 62.2
  Top Layer w0.305: v1(36.195,66.355) 38.575,63.975 41.021,63.975 62.611,63.975 64.77,61.816 v1(64.77,39.21)
  Bottom Layer w0.305: U16.4 34.839,61.775 34.29,62.324 34.29,64.45 v1(36.195,66.355) ; v1(64.77,39.21) MD1.7
DP_3B: C5.2 C6.1 U14.18 | length 23.5
  Bottom Layer w0.305: C5.2@96.84,58.26 C5.2 96.52,58.26 97.79,59.53 99.695,59.53 100.965,58.26 104.14,58.26 104.14,59.022 102.87,60.292 102.87,64.356 103.632,65.118 105.156,65.118 107.849,62.425 U14.18
DP_3W: C4.1 U6.13 U6.14 U14.19 U14.20 | length 18.8
  Bottom Layer w0.305: U6.13 U6.14 101.28,62.07 100.33,63.02 C4.1 99.06,64.356 100.584,65.88 105.918,65.88 108.073,63.725 U14.20 U14.19
DP_4: MD1.8 U17.4 | length 70.7
  Top Layer w0.305: v1(36.195,55.72) 36.195,60.8 38.735,63.34 62.23,63.34 63.5,62.07 v1(63.5,36.67)
  Bottom Layer w0.305: U17.4 34.585,50.345 34.29,50.64 34.29,52.545 36.195,54.45 v1(36.195,55.72) ; v1(63.5,36.67) MD1.8
DP_4A: C6.2 U6.12 U14.11 | length 8.5
  Bottom Layer w0.305: U6.12 102.55,56.04 102.75,56.04 C6.2 105.73,56.04 107.565,57.875 U14.11
DP_5: MD1.9 U18.4 | length 39.1
  Top Layer w0.305: v1(36.195,36.035) 36.195,35.4 37.465,34.13 v1(64.77,34.13)
  Bottom Layer w0.305: U18.4 34.839,31.295 34.29,31.844 34.29,34.13 v1(36.195,36.035) ; v1(64.77,34.13) MD1.9
DP_5A: C7.2 R5.2 TP3.01 U14.1 | length 42.9
  Bottom Layer w0.305: C7.2 R5.2 92.014,61.12 92.71,61.816 92.71,66.515 94.615,68.42 117.475,68.42 118.11,67.785 118.11,65.88 118.11,64.61 117.225,63.725 U14.1
DP_5W: C1.1 U14.2 U14.3 U14.8 | length 14.4
  Bottom Layer w0.305: U14.8 116.993,59.175 118.11,60.292 118.11,61.308 116.993,62.425 U14.3 U14.2 119.325,63.075 C1.1
DP_6: MD1.10 U19.4 | length 46.9
  Top Layer w0.305: v1(34.29,25.24) 34.29,30.32 37.465,33.495 61.443,33.495 v1(63.369,31.568)
  Bottom Layer w0.305: v1(34.29,25.24) 34.29,20.414 34.839,19.865 U19.4 ; v1(63.369,31.568) 67.288,31.568 MD1.10
DP_6W: C11.2 U7.3 U14.9 U14.10 | length 8.4
  Bottom Layer w0.305: U14.9 U14.10 119.315,57.875 C11.2 120.97,57.94 U7.3
DP_7: MD1.11 U20.4 | length 56.4
  Top Layer w0.305: v1(78.74,29.05) 80.01,30.32 85.09,30.32 88.9,34.13 113.665,34.13 114.3,34.765 v1(114.935,35.4)
  Bottom Layer w0.305: MD1.11 v1(78.74,29.05) ; U20.4 113.579,31.295 113.03,31.844 113.03,33.495 114.3,34.765 v1(114.935,35.4)
DP_7A: C1.2 U7.1 U7.2 U15.1 | length 19.6
  Bottom Layer w0.305: U15.1 117.987,52.295 121.412,55.72 122.428,55.72 123.19,56.482 123.19,58.26 U7.2 ; C1.2 120.97,59.53 U7.2 ; U7.1 U7.2
DP_7W: C2.1 U15.2 U15.3 U15.8 | length 24.9
  Bottom Layer w0.305: U15.8 117.247,47.745 118.11,48.608 118.11,50.132 117.247,50.995 U15.3 U15.2 119.369,51.645 120.904,53.18 122.936,53.18 124.46,51.656 C2.1
DP_8: MD1.12 U21.4 | length 75.5
  Top Layer w0.305: v1(78.74,26.51) 78.74,20.16 81.28,17.62 89.535,17.62 92.837,14.318 115.062,14.318 118.11,17.366 118.11,21.748 115.887,23.97 v1(114.935,23.97)
  Bottom Layer w0.305: MD1.12 v1(78.74,26.51) ; U21.4 113.579,19.865 113.03,20.414 113.03,22.065 v1(114.935,23.97)
DP_8W: C10.2 U7.5 U15.9 U15.10 | length 10.9
  Bottom Layer w0.305: U15.10 U15.9 114.621,47.084 117.856,47.084 118.552,47.78 C10.2 119.38,49.37 U7.5
DP_9B: C19.2 C20.1 U17.13 | length 12.1
  Bottom Layer w0.305: C19.2 20.64,48.1 23.368,48.1 24.13,47.338 24.13,46.576 24.826,45.88 C20.1 25.409,45.889 26.999,45.889 28.855,47.745 U17.13
DP_9W: C16.1 U8.8 U8.9 U17.11 U17.12 | length 22.8
  Top Layer w0.305: U8.8 U8.9
  Bottom Layer w0.305: C16.1 17.78,55.212 19.05,53.942 19.05,51.275 21.209,49.116 22.606,49.116 U8.9 ; U8.8 22.86,46.068 24.384,44.544 26.924,44.544 28.825,46.445 U17.11 U17.12
DP_10A: C20.2 U8.10 U17.20 | length 14.7
  Bottom Layer w0.305: C20.2 25.4,48.608 22.86,51.148 U8.10 22.86,52.672 24.384,54.196 27.559,54.196 29.46,52.295 U17.20
DP_11B: C16.2 C17.1 U16.18 | length 22.7
  Bottom Layer w0.305: C16.2 17.78,58.514 18.796,59.53 21.082,59.53 22.352,58.26 25.08,58.26 C17.1@25.16,58.18 ; C17.1@25.24,58.1 C17.1 ; C17.1@25.24,58.26 C17.1@25.32,58.18 ; C17.1@25.32,58.34 24.13,59.53 24.13,64.102 24.638,64.61 26.67,64.61 28.855,62.425 U16.18
DP_11W: C15.1 U8.13 U8.14 U16.19 U16.20 | length 18.3
  Bottom Layer w0.305: U8.13 U8.14 21.91,63.02 C15.1 20.32,64.102 21.59,65.372 27.178,65.372 28.825,63.725 U16.20 U16.19
DP_12A: C17.2 U8.12 U16.11 | length 8.5
  Bottom Layer w0.305: U8.12 24.13,56.99 25.146,55.974 25.4,55.974 27.559,55.974 29.46,57.875 U16.11
DP_13A: C18.2 R11.2 TP5.01 U16.1 | length 42.5
  Bottom Layer w0.305: C18.2 R11.2 13.02,61.12 13.97,62.07 13.97,65.88 15.715,67.625 39.37,67.625 40.005,66.99 TP5.01 40.005,65.245 38.485,63.725 U16.1 ; TP5.01@39.37,66.515 TP5.01@39.624,66.769
DP_13W: C13.1 U16.2 U16.3 U16.8 | length 14.7
  Bottom Layer w0.305: U16.8 38.507,59.175 39.37,60.038 39.37,61.562 38.507,62.425 U16.3 U16.2 40.585,63.075 C13.1
DP_14W: C22.2 U9.3 U16.9 U16.10 | length 8.6
  Bottom Layer w0.305: U16.10 U16.9 35.881,58.514 37.084,58.514 39.751,58.514 40.325,57.94 C22.2 42.23,57.94 U9.3
DP_15A: C13.2 U9.1 U9.2 U17.1 | length 19.8
  Bottom Layer w0.305: U17.1 39.247,52.295 42.672,55.72 43.688,55.72 44.45,56.482 44.45,58.26 U9.2 ; C13.2@40.48,61.12 42.07,59.53 U9.2 ; U9.1 U9.2
DP_15W: C12.1 U17.2 U17.3 U17.8 | length 20.5
  Bottom Layer w0.305: U17.8 38.507,47.745 39.37,48.608 39.37,50.132 38.507,50.995 U17.3 U17.2 40.375,51.645 41.91,53.18 45.4,53.18 C12.1
DP_16W: C21.2 U9.5 U17.9 U17.10 | length 10.9
  Bottom Layer w0.305: U17.10 U17.9 38.873,47.095 39.558,47.78 C21.2 40.64,49.37 U9.5
DP_17B: C31.2 C32.1 U19.13 | length 12.2
  Bottom Layer w0.305: C31.2 20.779,17.759 23.483,17.759 23.982,17.26 23.982,16.498 25.08,15.4 C32.1 26.99,15.4 28.855,17.265 U19.13
DP_17W: C28.1 U10.8 U10.9 U19.11 U19.12 | length 24
  Top Layer w0.305: U10.8 U10.9
  Bottom Layer w0.305: C28.1 19.05,24.29 19.05,19.398 19.812,18.636 22.606,18.636 U10.9 ; U10.8 22.86,14.92 23.716,14.064 26.924,14.064 28.825,15.965 U19.11 U19.12
DP_18A: C32.2 U10.10 U19.20 | length 14.7
  Bottom Layer w0.305: C32.2 25.4,18.128 22.86,20.668 U10.10 22.86,22.192 24.384,23.716 26.924,23.716 28.825,21.815 U19.20
DP_19B: C28.2 C29.1 U18.18 | length 22.3
  Bottom Layer w0.305: C28.2 19.37,29.05 20.828,29.05 22.098,27.78 C29.1@25.08,27.78 ; C29.1 C29.1@25.08,27.78 ; U18.18 30.158,31.933 28.867,31.933 26.67,34.13 24.638,34.13 24.13,33.622 24.13,28.73 C29.1@25.08,27.78
DP_19W: C27.1 U10.13 U10.14 U18.19 U18.20 | length 17.8
  Bottom Layer w0.305: U10.13 U10.14 22.54,31.59 21.59,32.54 C27.1 20.32,32.86 22.352,34.892 28.523,34.892 U18.20 U18.19
DP_20A: C29.2 U10.12 U18.11 | length 8.5
  Bottom Layer w0.305: U10.12 24.13,26.51 24.892,25.748 25.212,25.748 C29.2 26.99,25.56 28.825,27.395 U18.11
DP_21A: C30.2 R22.2 TP9.01 U18.1 | length 42.9
  Bottom Layer w0.305: C30.2 12.7,30.32 13.97,31.59 13.97,36.67 15.24,37.94 38.575,37.94 39.37,37.145 39.37,35.4 39.37,34.13 38.485,33.245 U18.1
DP_21W: C24.1 U18.2 U18.3 U18.8 | length 14.7
  Bottom Layer w0.305: U18.8 38.507,28.695 39.37,29.558 39.37,31.082 38.507,31.945 U18.3 U18.2 40.585,32.595 C24.1
DP_22W: C34.2 U11.3 U18.9 U18.10 | length 8.6
  Bottom Layer w0.305: U18.10 U18.9 40.055,28.045 C34.2 42.23,27.46 U11.3
DP_23A: C24.2 U11.1 U11.2 U19.1 | length 19.6
  Bottom Layer w0.305: U19.1 39.247,21.815 42.672,25.24 43.688,25.24 44.45,26.002 44.45,27.78 U11.2 ; C24.2 42.23,29.05 U11.2 ; U11.1 U11.2
DP_23W: C23.1 U19.2 U19.3 U19.8 | length 20.5
  Bottom Layer w0.305: U19.8 38.507,17.265 39.37,18.128 39.37,19.652 38.507,20.515 U19.3 U19.2 40.375,21.165 41.91,22.7 45.4,22.7 C23.1
DP_24W: C33.2 U11.5 U19.9 U19.10 | length 10.9
  Bottom Layer w0.305: U19.10 U19.9 38.685,16.615 39.37,17.3 C33.2 40.64,18.89 U11.5
DP_25B: C42.2 C43.1 U21.13 | length 12.3
  Bottom Layer w0.305: C42.2 99.38,17.62 102.362,17.62 102.87,17.112 102.87,16.096 103.566,15.4 C43.1 105.73,15.4 107.595,17.265 U21.13
DP_25W: C39.1 U12.8 U12.9 U21.11 U21.12 | length 21.8
  Top Layer w0.305: U12.8 U12.9
  Bottom Layer w0.305: C39.1 99.06,23.02 99.06,21.43 U12.9 ; U12.8 101.6,14.92 102.456,14.064 105.664,14.064 107.565,15.965 U21.11 U21.12
DP_26A: C43.2 U12.10 U21.20 | length 14.7
  Bottom Layer w0.305: C43.2 104.14,18.128 101.6,20.668 U12.10 101.6,22.192 103.124,23.716 105.664,23.716 107.565,21.815 U21.20
DP_27B: C39.2 C40.1 U20.18 | length 23.4
  Bottom Layer w0.305: C39.2 98.11,29.05 99.695,29.05 100.965,27.78 103.82,27.78 C40.1 104.14,28.415 102.87,29.685 102.87,33.876 103.632,34.638 105.156,34.638 107.849,31.945 U20.18
DP_27W: C38.1 U12.13 U12.14 U20.19 U20.20 | length 19.8
  Bottom Layer w0.305: 100.518,32.54 C38.1 ; U12.13 U12.14 100.65,32.54 C38.1 ; U20.19 U20.20 108.327,33.245 106.172,35.4 101.346,35.4 99.06,33.114 C38.1
DP_28A: C40.2 U12.12 U20.11 | length 8.5
  Bottom Layer w0.305: U12.12 102.616,26.51 103.566,25.56 C40.2 107.075,25.56 U20.11
DP_29A: C41.2 R32.2 TP12.01 U20.1 | length 40.9
  Bottom Layer w0.305: C41.2 R32.2 91.506,30.574 91.948,30.574 92.71,31.336 92.71,36.162 93.98,37.432 116.078,37.432 116.84,36.67 TP12.01 ; U20.1 115.955,33.245 118.11,35.4 TP12.01@118.11,36.035
DP_29W: C36.1 U20.2 U20.3 U20.8 | length 15.1
  Bottom Layer w0.305: U20.8 117.247,28.695 118.11,29.558 118.11,31.082 117.247,31.945 U20.3 U20.2 119.115,32.595 119.38,32.86 C36.1
DP_30W: C46.2 U13.3 U20.9 U20.10 | length 8.9
  Bottom Layer w0.305: U20.10 U20.9 114.621,28.034 117.348,28.034 117.922,27.46 C46.2 119.7,27.78 120.65,27.78 U13.3
DP_31A: C36.2 U13.1 U13.2 U21.1 | length 18.8
  Bottom Layer w0.305: U21.1@115.224,21.843 117.888,21.843 121.285,25.24 122.555,25.24 123.19,25.875 123.19,27.78 U13.2 U13.1 120.97,30.64 C36.2
DP_31W: C35.1 U21.2 U21.3 U21.8 | length 20.4
  Bottom Layer w0.305: U21.8 117.12,17.265 118.11,18.255 118.11,19.525 117.12,20.515 U21.3 U21.2 119.115,21.165 120.65,22.7 124.14,22.7 C35.1
DP_32W: C44.2 U13.5 U21.9 U21.10 | length 10.9
  Bottom Layer w0.305: U21.10 U21.9 114.681,16.544 117.669,16.544 118.425,17.3 C44.2 119.38,18.89 U13.5
Höhen_In: C42.1 R40.2 TP11.01 U12.7 | length 12.7
  Bottom Layer w0.305: TP11.01@89.535,12.54 89.535,14.445 91.44,16.35 U12.7 94.996,15.334 96.454,15.334 R40.2 C42.1
Kick_In: C19.1 R14.2 TP6.01 U8.7 | length 9.8
  Bottom Layer w0.305: U8.7 15.56,46.83 16.51,45.88 R14.2 C19.1@20,45.88 ; C19.1 20.32,44.29 21.59,43.02 TP6.01
"KST_1_1 / Line_Aux": J1.4 U7.10 U9.10 U11.10 U13.10 | length 246.8
  Bottom Layer w0.305: U11.10 49.53,20.16 49.53,15.715 50.165,15.08 56.515,15.08 59.69,18.255 59.69,45.56 ; U9.10 49.53,50.64 49.53,46.195 50.165,45.56 59.69,45.56 ; U13.10 128.27,20.16 128.27,15.842 129.286,14.826 135.128,14.826 138.43,18.128 138.43,45.56 ; U7.10 128.27,50.64 128.27,46.195 128.905,45.56 138.43,45.56 ; 59.69,45.56 59.69,58.26 61.595,60.165 67.945,60.165 69.92,62.14 69.92,62.3 70.08,62.3 71.12,63.34 71.12,69.055 73.66,71.595 132.08,71.595 138.43,65.245 138.43,45.56
KST_1_2: J1.1 R15.1 R28.1 R41.1 | length 235.2
  Top Layer w0.305: v1(7.62,55.72) v1(7.62,46.83) 8.255,46.195 8.255,11.905 10.668,9.492 85.217,9.492 86.835,11.11 86.995,11.27 v1(86.995,11.905)
  Bottom Layer w0.305: R28.1 v1(7.62,46.83) ; R15.1 v1(7.62,55.72) 7.62,64.102 14.224,70.706 44.704,70.706 48.895,66.515 64.135,66.515 65.81,64.84 J1.1@67.38,64.84 ; v1(86.995,11.905) 86.995,16.35 88.9,18.255 R41.1
Masse: C10.1 C11.1 C21.1 C22.1 C33.1 C34.1 C44.1 C46.1 C48.1 C49.1 C50.1 C51.1 C52.1 C53.1 C54.1 C55.1 C56.1 C57.1 C58.1 C59.1 C60.1 C61.1 C62.1 C63.1 C64.1 C65.1 C66.1 C67.1 C68.1 C69.1 C70.1 C71.1 C72.1 J1.3 J1.5 J1.9 MD1.4 MD1.29 R3.1 R4.1 R5.1 R8.1 R9.1 R10.1 R11.1 R19.1 R20.1 R21.1 R22.1 R24.1 R30.1 R31.1 R32.1 R35.1 R37.1 R45.1 R47.1 U6.5 U8.5 U10.5 U12.5 U14.7 U14.12 U14.13 U15.7 U15.18 U15.19 U16.7 U16.12 U16.13 U17.7 U17.18 U17.19 U18.7 U18.12 U18.13 U19.7 U19.18 U19.19 U20.7 U20.12 U20.13 U21.7 U21.18 U21.19 | length 4.2
  Top Layer w0.305: v1(72.39,67.15) v1@72.46,67.08
  Bottom Layer w0.305: v1(69.85,67.15) 69.92,67.08 J1.3 ; J1.5@72.39,65.245 v1(72.39,67.15)
  other v1: 3.81,11.27 146.05,11.27 109.855,23.97 113.03,23.97 31.115,25.24 38.1,26.51 93.98,35.4 15.24,36.035 43.18,36.035 109.855,54.45 116.84,54.45 31.115,55.72 38.1,55.72 15.24,65.245 93.98,65.88 3.81,68.42 146.05,68.42
Mitten_In: C31.1 R27.2 TP8.01 U10.7 | length 10.9
  Bottom Layer w0.305: U10.7 16.19,15.4 R27.2 C31.1 20.32,13.015 21.59,11.745 TP8.01
NetC2_2: C2.2 C3.1 U7.6 U7.7 | length 9.6
  Bottom Layer w0.305: C3.1 U7.7 ; U7.6 U7.7 ; C2.2 122.87,45.88 U7.7
NetC4_2: C4.2 R4.2 U6.3 | length 7.7
  Bottom Layer w0.305: U6.3 93.98,57.752 96.52,60.292 R4.2 C4.2
NetC7_1: C7.1 U6.1 U6.2 | length 7.3
  Bottom Layer w0.305: C7.1 91.76,56.04 92.71,56.99 92.71,58.26 U6.2 U6.1
NetC12_2: C12.2 C14.1 U9.6 U9.7 | length 9.9
  Bottom Layer w0.305: C14.1 U9.7 U9.6 44.77,50.96 C12.2
NetC15_2: C15.2 R10.2 U8.3 | length 7.7
  Bottom Layer w0.305: U8.3 15.24,57.752 17.78,60.292 R10.2 C15.2
NetC18_1: C18.1 U8.1 U8.2 | length 7.3
  Bottom Layer w0.305: C18.1 13.02,56.04 13.97,56.99 13.97,58.26 U8.2 U8.1
NetC23_2: C23.2 C25.1 U11.6 U11.7 | length 10.9
  Bottom Layer w0.305: C25.1 43.18,14.76 U11.7 U11.6 44.77,20.48 C23.2
NetC26_1: C26.1 R13.2 U9.14 | length 5.9
  Bottom Layer w0.305: C26.1 49.85,61.12 U9.14 51.75,63.02 R13.2
NetC26_2: C26.2 R17.1 R20.2 | length 55.6
  Bottom Layer w0.305: R17.1 11.43,54.13 11.43,65.88 14.732,69.182 41.783,69.182 45.72,65.245 R20.2 C26.2
NetC27_2: C27.2 R21.2 U10.3 | length 7.7
  Bottom Layer w0.305: U10.3 15.24,27.145 17.78,29.685 R21.2 C27.2
NetC30_1: C30.1 U10.1 U10.2 | length 7.3
  Bottom Layer w0.305: C30.1 13.02,25.56 13.97,26.51 13.97,27.78 U10.2 U10.1
NetC35_2: C35.2 C37.1 U13.6 U13.7 | length 8.9
  Bottom Layer w0.305: U13.7 U13.6 ; C37.1 122.87,18.89 U13.6 ; C35.2 123.51,20.48 U13.6
NetC38_2: C38.2 R31.2 U12.3 | length 7.7
  Bottom Layer w0.305: U12.3 93.98,27.272 96.52,29.812 R31.2 C38.2
NetC41_1: C41.1 U12.1 U12.2 | length 7.3
  Bottom Layer w0.305: C41.1 91.76,25.56 92.71,26.51 92.71,27.526 93.98,28.796 U12.2 U12.1
NetC45_1: C45.1 R26.2 U11.14 | length 5.9
  Bottom Layer w0.305: C45.1 49.85,30.64 U11.14 51.75,32.54 R26.2
NetC45_2: C45.2 R33.1 R35.2 | length 57.7
  Bottom Layer w0.305: R33.1 11.43,23.65 11.43,36.67 14.605,39.845 41.275,39.845 45.72,35.4 R35.2 C45.2
NetC47_1: C47.1 R39.2 U13.14 | length 5.9
  Bottom Layer w0.305: C47.1 128.59,30.64 U13.14 130.49,32.54 R39.2
NetC47_2: C47.2 R43.1 R45.2 | length 57.1
  Bottom Layer w0.305: R43.1 91.44,22.7 90.17,23.97 90.17,36.67 92.71,39.21 120.65,39.21 124.46,35.4 R45.2 C47.2
NetR1_1: R1.1 R6.1 S1.3 U7.8 | length 23.4
  Bottom Layer w0.305: U7.8 S1.3 137.16,49.37 R1.1 135.57,61.12 R6.1
NetR1_2: R1.2 R2.1 U7.13 | length 10.1
  Bottom Layer w0.305: U7.13 131.13,61.12 R2.1 132.4,61.12 133.35,62.07 133.35,63.086 133.858,63.594 136.144,63.594 136.718,63.02 R1.2
NetR6_2: R6.2 R6.3 R7.1 S1.2 U7.9 | length 17.8
  Bottom Layer w0.305: U7.9 131.13,50.96 R7.1 133.67,49.37 S1.2 136.144,50.894 136.144,55.466 R6.3 R6.2
NetR7_2: R7.2 R8.2 U7.12 | length 5.8
  Bottom Layer w0.305: U7.12 130.49,56.04 R8.2 ; R7.2 R8.2@132.08,55.72
NetR12_1: R12.1 R18.1 S2.3 U9.8 | length 23.4
  Bottom Layer w0.305: U9.8 S2.3 58.42,49.37 R12.1 56.83,61.12 R18.1
NetR12_2: R12.2 R13.1 U9.13 | length 10.6
  Bottom Layer w0.305: U9.13 52.39,61.12 R13.1 53.66,61.12 54.61,62.07 54.61,63.34 55.245,63.975 57.15,63.975 58.105,63.02 R12.2
NetR14_1: R14.1 R15.2 R16.2 R17.2 U8.6 | length 11.5
  Bottom Layer w0.305: R15.2 R16.2 R17.2 14.29,49.37 U8.6 16.19,49.37 R14.1
NetR18_2: R18.2 R18.3 R23.1 S2.2 U9.9 | length 18.1
  Bottom Layer w0.305: U9.9 52.39,50.96 R23.1 54.93,49.37 S2.2 56.388,49.37 57.404,50.386 57.404,55.466 R18.3 R18.2
NetR23_2: R23.2 R24.2 U9.12 | length 6.1
  Bottom Layer w0.305: U9.12 51.75,56.04 R24.2 R23.2
NetR25_1: R25.1 R34.1 S3.3 U11.8 | length 23.4
  Bottom Layer w0.305: U11.8 S3.3 58.42,18.89 R25.1 56.83,30.64 R34.1
NetR25_2: R25.2 R26.1 U11.13 | length 10.6
  Bottom Layer w0.305: U11.13 52.39,30.64 R26.1 53.66,30.64 54.61,31.59 54.61,32.86 55.245,33.495 57.15,33.495 58.105,32.54 R25.2
NetR27_1: R27.1 R28.2 R29.2 R33.2 U10.6 | length 11.5
  Bottom Layer w0.305: R28.2 R29.2 R33.2 14.29,18.89 U10.6 16.19,18.89 R27.1
NetR34_2: R34.2 R34.3 R36.1 S3.2 U11.9 | length 17.6
  Bottom Layer w0.305: U11.9 52.39,20.48 R36.1 54.93,18.89 S3.2 57.15,20.16 57.15,25.24 R34.3 R34.2
NetR36_2: R36.2 R37.2 U11.12 | length 6.2
  Bottom Layer w0.305: U11.12 50.8,26.332 51.572,25.56 R37.2 R36.2
NetR38_1: R38.1 R44.1 S4.3 U13.8 | length 23.4
  Bottom Layer w0.305: U13.8 S4.3 137.16,18.89 R38.1 135.57,30.64 R44.1
NetR38_2: R38.2 R39.1 U13.13 | length 10.1
  Bottom Layer w0.305: U13.13 131.13,30.64 R39.1 132.4,30.64 133.35,31.59 133.35,32.606 133.858,33.114 136.144,33.114 136.718,32.54 R38.2
NetR40_1: R40.1 R41.2 R42.2 R43.2 U12.6 | length 12.3
  Bottom Layer w0.305: R42.2 R41.2 89.22,22.38 91.12,20.48 R43.2 93.03,18.89 U12.6 94.93,18.89 R40.1
NetR44_2: R44.2 R44.3 R46.1 S4.2 U13.9 | length 18.1
  Bottom Layer w0.305: U13.9 131.13,20.48 R46.1 133.67,18.89 S4.2 134.874,18.89 136.144,20.16 136.144,25.24 134.874,26.51 R44.3 R44.2
NetR46_2: R46.2 R47.2 U13.12 | length 6.1
  Bottom Layer w0.305: U13.12 130.49,25.56 R47.2 R46.2
NetU6_6: U6.6 U6.7 | length 2.5
  Bottom Layer w0.305: U6.7 U6.6
Reset: MD1.3 U14.15 U15.15 U16.15 U17.15 U18.15 U19.15 U20.15 U21.15 | length 187
  Top Layer w0.305: v1(31.115,36.035) 30.797,36.353 31.115,36.67 v1(31.115,41.75) 33.02,43.655 55.88,43.655 v1(61.595,49.37) ; v1(109.855,35.4) v1(109.855,41.75)
  Bottom Layer w0.305: U19.15 31.171,18.565 32.385,19.779 32.385,29.995 ; U18.15 32.385,29.995 ; U17.15 32.385,49.045 ; U16.15 31.915,60.475 32.385,60.005 32.385,49.045 ; v1(31.115,36.035) 32.385,34.765 32.385,29.995 ; v1(31.115,41.75) 32.385,43.02 32.385,49.045 ; v1(61.595,49.37) MD1.3 68.58,48.1 90.17,48.1 96.52,41.75 v1(109.855,41.75) 111.125,43.02 111.125,49.045 ; U21.15 109.911,18.565 111.125,19.779 111.125,30.066 ; U20.15 111.054,29.995 111.125,30.066 ; U15.15 111.125,49.045 ; U14.15 110.655,60.475 111.125,60.005 111.125,49.045 ; v1(109.855,35.4) 111.125,34.13 111.125,30.066
pads on no net: J1.7 MD1.1 MD1.2 MD1.13 MD1.14 MD1.17 MD1.18 MD1.19 MD1.20 MD1.21 MD1.22 MD1.23 MD1.24 MD1.25 MD1.26 MD1.28 S1.1 S2.1 S3.1 S4.1 U14.14 U14.16 U15.14 U15.16 U16.14 U16.16 U17.14 U17.16 U18.14 U18.16 U19.14 U19.16 U20.14 U20.16 U21.14 U21.16
copper on no net: | length 0.1
  Bottom Layer w0.305: 74.93,64.91 75,64.84

## Polygon pours and split planes (outlines as drawn)
Masse on Top Layer "Top Layer-No Net1" (solid, pour order 7): 0,0 150,0 150,75 0,75
Masse on Bottom Layer "Top Layer-No Net" (solid, pour order 6): 0,0 150,0 150,75 0,75

## Silkscreen, mask and mechanical layers (free items; w line width, h text height)
Top Overlay:
  text "DiKo PreAmp 1.0 Frequenzweiche" at 143.51,72.39 h1.78 r180
Mechanical 1:
  the board outline again, w0.254

## Text inside footprints (layer, text, board x,y; h text height)
R6: Top Overlay "1" at 139.319,62.07 h1.52 r90; Top Overlay "2" at 139.319,59.403 h1.52 r90; Top Overlay "3" at 139.319,56.863 h1.52 r90
R18: Top Overlay "1" at 60.706,61.816 h1.52 r90; Top Overlay "2" at 60.706,59.276 h1.52 r90; Top Overlay "3" at 60.706,56.736 h1.52 r90
R34: Top Overlay "1" at 60.706,31.336 h1.52 r90; Top Overlay "2" at 60.706,28.796 h1.52 r90; Top Overlay "3" at 60.706,26.256 h1.52 r90
R44: Top Overlay "1" at 139.319,31.59 h1.52 r90; Top Overlay "2" at 139.319,28.923 h1.52 r90; Top Overlay "3" at 139.319,26.383 h1.52 r90
S1: Top Overlay "1" at 139.319,51.91 h1.52 r90; Top Overlay "2" at 139.319,49.243 h1.52 r90; Top Overlay "3" at 139.319,46.703 h1.52 r90
S2: Top Overlay "1" at 60.706,51.656 h1.52 r90; Top Overlay "2" at 60.706,49.116 h1.52 r90; Top Overlay "3" at 60.706,46.576 h1.52 r90
S3: Top Overlay "1" at 60.706,21.176 h1.52 r90; Top Overlay "2" at 60.706,18.636 h1.52 r90; Top Overlay "3" at 60.706,16.096 h1.52 r90
S4: Top Overlay "1" at 139.446,21.176 h1.52 r90; Top Overlay "2" at 139.446,18.636 h1.52 r90; Top Overlay "3" at 139.446,16.096 h1.52 r90